# Altium PCB benchtoppcbv1.PcbDoc
Units mil, origin at the board's own origin, x right, y up, seen from the top; angles counter-clockwise.
Board outline 11400.67 x 6976.38 mil, 2 copper layers (LV, HV); 113 components, 23 nets, 183 pads, 0 vias.
Unrouted connection lines stored in the file: 29.
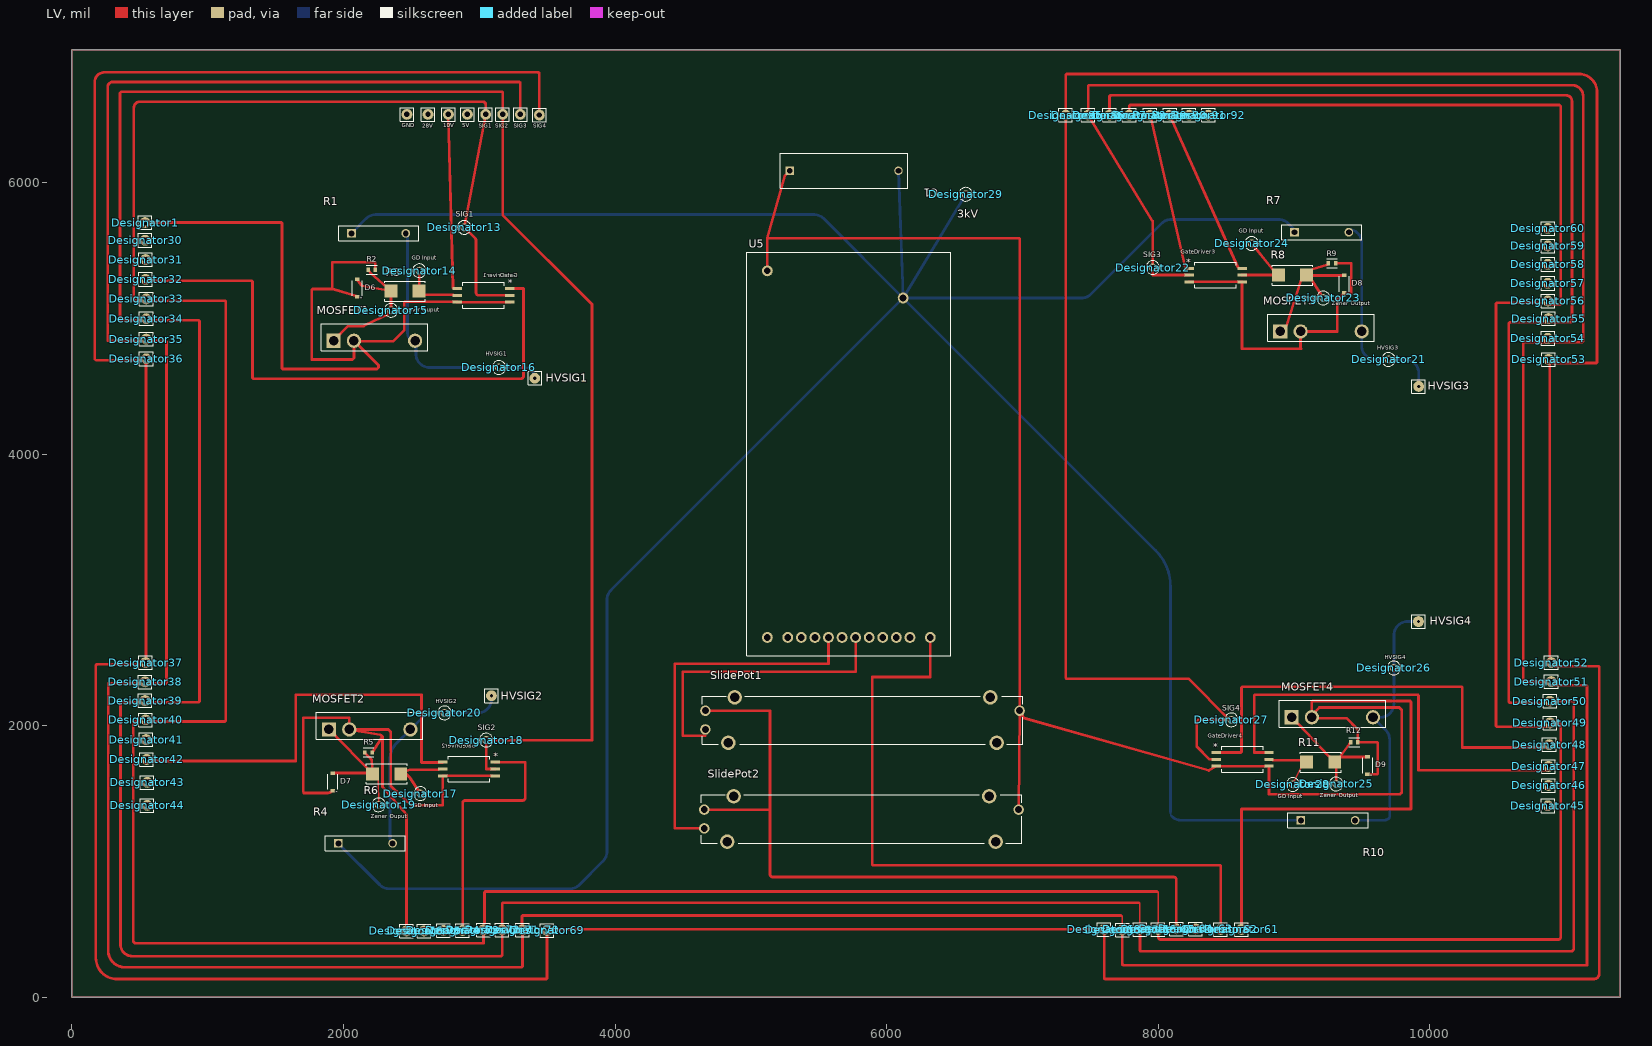
[diagram p0: LV view]
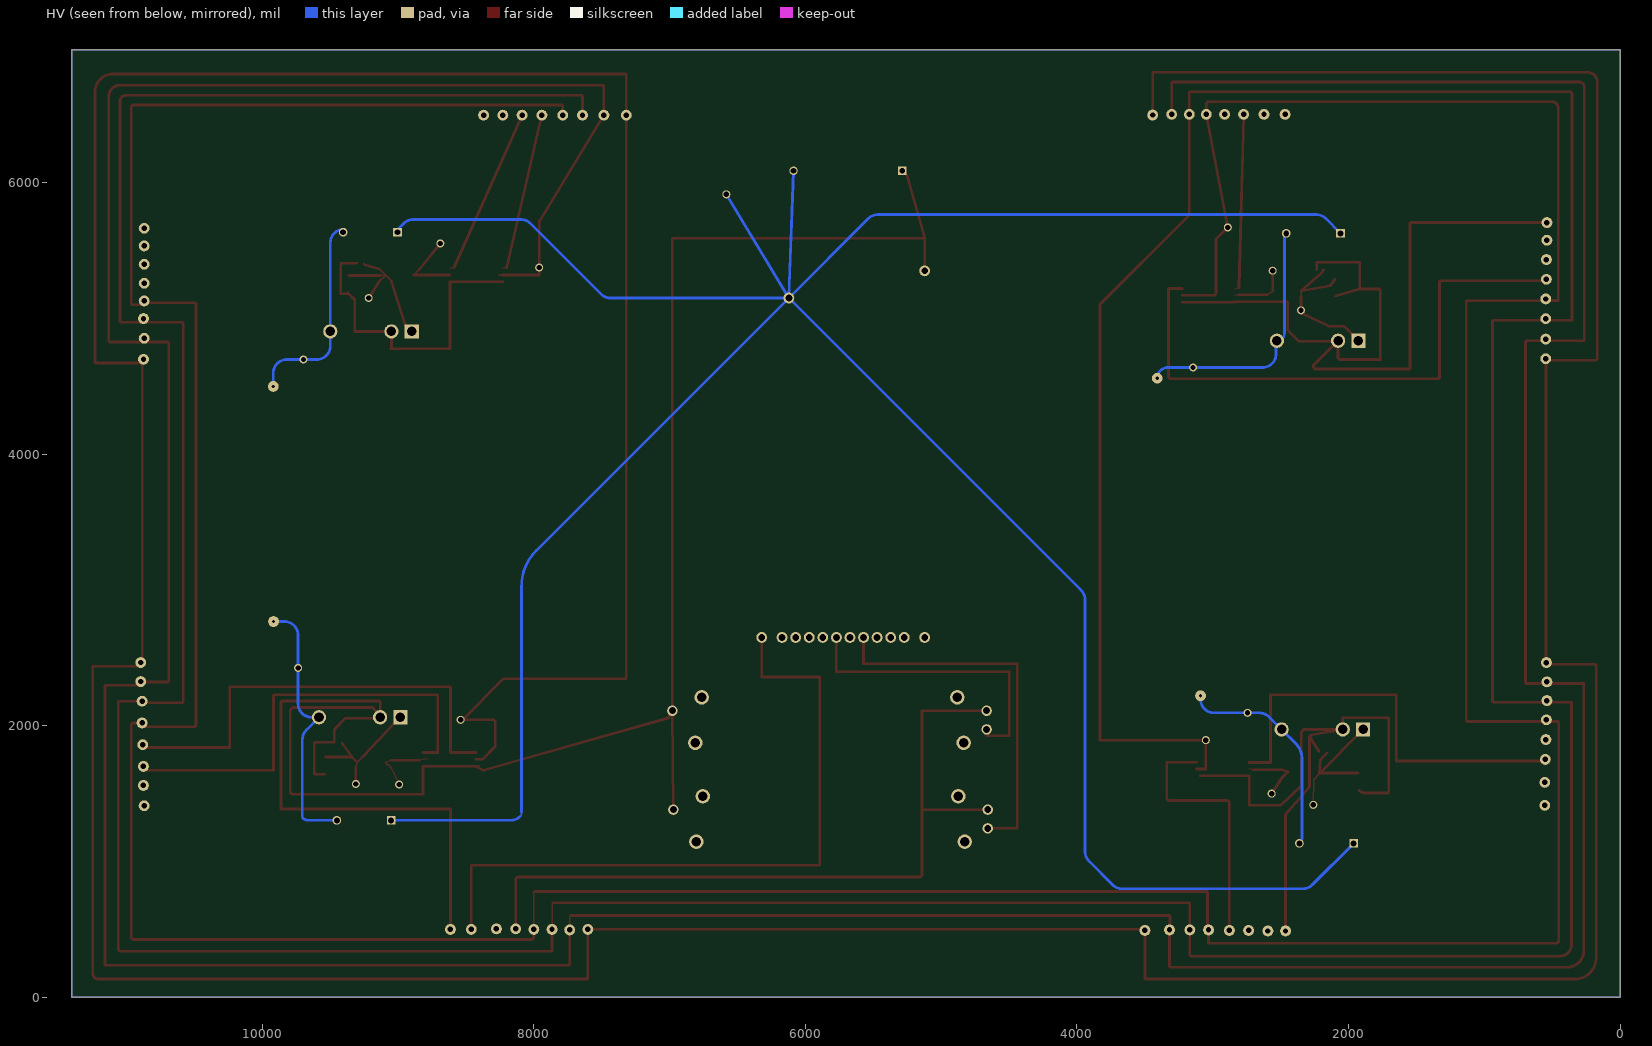
[diagram p1: HV view, seen from below]

## Layer stack, top to bottom
Top Solder: solder mask 0.4, Solder Resist, Dk 3.5
LV: signal copper 1.4
Dielectric 1: dielectric 12.6, FR-4, Dk 4.8
HV: signal copper 1.4
Bottom Solder: solder mask 0.4, Solder Resist, Dk 3.5

## Board outline
0,0 11400.67,0 11400.67,6976.38 0,6976.38

## Design rules (kind name [scope] priority, off if disabled: settings)
Clearance Clearance_1 [All] p1: gap=10 ignorepadtopadclearanceinfootprint=FALSE except(0: Arc-Hole Track-Hole SMDPad-Hole THPad-Hole Via-Hole Fill-Hole Poly-Hole Region-Hole Text-Hole)
Clearance [All] p2: gap=10 ignorepadtopadclearanceinfootprint=FALSE except(0: Arc-Hole Track-Hole SMDPad-Hole THPad-Hole Via-Hole Fill-Hole Poly-Hole Region-Hole Text-Hole)
Height [All] p1 off: minheight=0 maxheight=1000 prefheight=500
PolygonConnect [All] p1: connectstyle=Relief reliefconductorwidth=10 reliefentries=4 polygonreliefangle="90 Angle" airgapwidth=10
RoutingVias [All] p1: holewidth=28 width=50 viastyle="Through Hole" minholewidth=28 minwidth=50 maxholewidth=28 maxwidth=50
SolderMaskExpansion [All] p1: expansion=4 istentingtop=FALSE
Width [All] p1 off: maxlimit=10 minlimit=10 preferedwidth=10
29 further rules are at their usual default settings.

## Components (designator, comment, footprint, x,y, rotation, side; value= is the part's Value field where it differs from the comment)
5V "Comment" VIA 2912.09,6502.05 r0 top
10V "Comment" VIA 2772.09,6502.05 r0 top
28V "Comment" VIA 2622.09,6502.05 r0 top
C1 "27n" "HV CAPACITOR" 5286.5,6086.61 r0 top
D6 "Zener Diode" "ZENER DIODE" 2101.32,5222.24 r90 top
D7 "Zener Diode" "ZENER DIODE" 1920.35,1586.61 r90 top (schematic designator D6)
D8 "Zener Diode" "ZENER DIODE" 9369.17,5251.97 r90 top (schematic designator D6)
D9 "Zener Diode" "ZENER DIODE" 9541.22,1707.17 r90 top (schematic designator D6)
Designator1 "Via" VIA 538.46,5704.72 r0 top
Designator13 "Comment" KSTN-5003 2888.86,5669.29 r0 top
Designator14 "Comment" KSTN-5003 2558.15,5350.39 r0 top
Designator15 "Comment" KSTN-5003 2349.49,5059.06 r0 top
Designator16 "Comment" KSTN-5003 3144.76,4637.8 r0 top
Designator17 "Comment" KSTN-5003 2566.02,1500 r0 top
Designator18 "Comment" KSTN-5003 3050.28,1893.7 r0 top
Designator19 "Comment" KSTN-5003 2258.94,1417.32 r0 top
Designator20 "Comment" KSTN-5003 2743.19,2094.49 r0 top
Designator21 "Comment" KSTN-5003 9695.94,4696.85 r0 top
Designator22 "Comment" KSTN-5003 7959.72,5374.02 r0 top
Designator23 "Comment" KSTN-5003 9215.63,5149.61 r0 top
Designator24 "Comment" KSTN-5003 8688.07,5551.18 r0 top
Designator25 "Comment" KSTN-5003 9310.12,1570.87 r0 top
Designator26 "Comment" KSTN-5003 9735.31,2425.2 r0 top
Designator27 "Comment" KSTN-5003 8538.46,2043.31 r0 top
Designator28 "Comment" KSTN-5003 8991.22,1566.93 r0 top
Designator29 "Comment" KSTN-5003 6581.77,5913.39 r0 top
Designator30 "Comment" VIA 538.46,5574.8 r0 top
Designator31 "Comment" VIA 542.4,5432.4 r0 top
Designator32 "Comment" VIA 542.4,5287.4 r0 top
Designator33 "Comment" VIA 547.4,5142.4 r0 top
Designator34 "Comment" VIA 547.4,4997.4 r0 top
Designator35 "Comment" VIA 547.4,4847.4 r0 top
Designator36 "Comment" VIA 547.4,4702.4 r0 top
Designator37 "Comment" VIA 542.4,2464.57 r0 top
Designator38 "Comment" VIA 538.46,2322.83 r0 top
Designator39 "Comment" VIA 538.46,2185.04 r0 top
Designator40 "Comment" VIA 542.4,2043.31 r0 top
Designator41 "Comment" VIA 546.34,1897.64 r0 top
Designator42 "Comment" VIA 550.28,1751.97 r0 top
Designator43 "Comment" VIA 554.21,1582.68 r0 top
Designator44 "Comment" VIA 554.21,1413.39 r0 top
Designator45 "Comment" VIA 10869.02,1410.32 r0 top
Designator46 "Comment" VIA 10874.02,1560.32 r0 top
Designator47 "Comment" VIA 10874.02,1700.32 r0 top
Designator48 "Comment" VIA 10879.02,1860.32 r0 top
Designator49 "Comment" VIA 10884.02,2020.32 r0 top
Designator50 "Comment" VIA 10884.02,2180.31 r0 top
Designator51 "Comment" VIA 10894.02,2325.31 r0 top
Designator52 "Comment" VIA 10894.02,2465.31 r0 top
Designator53 "Comment" VIA 10873.7,4697.95 r0 top
Designator54 "Comment" VIA 10868.7,4852.95 r0 top
Designator55 "Comment" VIA 10873.7,4997.95 r0 top
Designator56 "Comment" VIA 10868.7,5127.95 r0 top
Designator57 "Comment" VIA 10868.7,5257.95 r0 top
Designator58 "Comment" VIA 10868.7,5397.95 r0 top
Designator59 "Comment" VIA 10868.7,5532.95 r0 top
Designator60 "Comment" VIA 10868.7,5662.95 r0 top
Designator61 "Comment" VIA 8613.27,500 r0 top
Designator62 "Comment" VIA 8459.72,500 r0 top
Designator63 "Comment" VIA 8274.68,503.94 r0 top
Designator64 "Comment" VIA 8132.95,503.94 r0 top
Designator65 "Comment" VIA 7999.09,500 r0 top
Designator66 "Comment" VIA 7865.24,500 r0 top
Designator67 "Comment" VIA 7735.31,496.06 r0 top
Designator68 "Comment" VIA 7601.46,500 r0 top
Designator69 "Comment" VIA 3499.09,492.13 r0 top
Designator70 "Comment" VIA 3317.99,496.06 r0 top
Designator71 "Comment" VIA 3168.39,496.06 r0 top
Designator72 "Comment" VIA 3030.59,496.06 r0 top
Designator73 "Comment" VIA 2877.05,492.13 r0 top
Designator74 "Comment" VIA 2735.32,492.13 r0 top
Designator75 "Comment" VIA 2593.58,488.19 r0 top
Designator76 "Comment" VIA 2463.66,488.19 r0 top
Designator85 "Comment" VIA 7317.99,6496.06 r0 top
Designator86 "Comment" VIA 7483.35,6496.06 r0 top
Designator87 "Comment" VIA 7640.83,6496.06 r0 top
Designator88 "Comment" VIA 7786.5,6496.06 r0 top
Designator89 "Comment" VIA 7940.04,6496.06 r0 top
Designator90 "Comment" VIA 8085.71,6496.06 r0 top
Designator91 "Comment" VIA 8227.44,6496.06 r0 top
Designator92 "Comment" VIA 8369.17,6496.06 r0 top
GateDriver1 "Comment" "GATE DRIVER"#1 3030.59,5169.29 r180 top
GateDriver2 "Comment" "GATE DRIVER"#1 2924.29,1681.1 r180 top
GateDriver3 "Comment" "GATE DRIVER"#2 8422.8,5318.46 r0 top
GateDriver4 "Comment" "GATE DRIVER"#2 8621.22,1752.17 r0 top
GND "Comment" VIA 2467.09,6502.05 r0 top
HVSIG1 "Comment" Via 3408.54,4559.06 r0 top
HVSIG2 "Comment" Via 3089.65,2220.47 r0 top
HVSIG3 "Comment" Via 9917.8,4498.46 r0 top
HVSIG4 "Comment" Via 9916.22,2767.17 r0 top
MOSFET1 "Comment" MOSFET 1926.65,4834.65 r0 top
MOSFET2 "Comment" MOSFET 1892.4,1972.44 r0 top
MOSFET3 "Comment" MOSFET 8897.8,4903.46 r0 top
MOSFET4 "Comment" MOSFET 8981.22,2062.17 r0 top
R1 "Comment" "HV RESISTOR" 2058.33,5626.06 r0 top
R2 "Resistor" "LV RESISTOR" 2207.76,5358.27 r180 top
R3 "Comment" "Zener Resistor" 2451.85,5200.79 r0 top
R4 "Comment" "HV RESISTOR" 1961.3,1133.86 r0 top
R5 "Resistor" "LV RESISTOR" 2184.13,1803.15 r180 top (schematic designator R2)
R6 "Comment" "Zener Resistor" 2317.99,1645.67 r0 top
R7 "Comment" "HV RESISTOR" 9003.03,5633.86 r0 top
R8 "Comment" "Zener Resistor" 8987.8,5318.46 r0 top
R9 "Resistor" "LV RESISTOR" 9278.62,5405.51 r180 top (schematic designator R2)
R10 "Comment" "HV RESISTOR" 9050.28,1303.15 r0 top
R11 "Comment" "Zener Resistor" 9196.22,1732.17 r0 top
R12 "Resistor" "LV RESISTOR" 9442.53,1877.95 r180 top (schematic designator R2)
SIG1 "Comment" VIA 3047.09,6502.05 r0 top
SIG2 "Comment" VIA 3172.09,6502.05 r0 top
SIG3 "Comment" VIA 3302.09,6502.05 r0 top
SIG4 "Comment" VIA 3442.09,6497.05 r0 top
SlidePot1 "Comment" "Slide Potentiometer" 4664.45,2110.24 r0 top
SlidePot2 "Comment" "Slide Potentiometer" 4656.57,1381.89 r0 top
U5 "Step Up Converter" "STEP UP CONVERTER" 6264.84,2635.04 r90 top

## Footprints (in the part's own frame and the unit in brackets; to place one, negate y for a bottom-side part, rotate by r counter-clockwise, add the part's x,y. Pads: shape width x height; smd on the part's side, far side on the other; paste and mask are expansions set on the pad)
"GATE DRIVER"#1 [mil] "ADuM4120"
  rect 69.53x22.08 smd paste+0 mask+0: 1(-194.13,-50) 2(-194.13,0) 3(-194.13,50) 4(194.13,50) 5(194.13,0) 6(194.13,-50)
  silkscreen extent -153,-95 153,95, body extent 0,-10 10,0, height 10
"GATE DRIVER"#2 [mil] "ADuM4120"
  rect 69.53x22.08 smd paste+0 mask+0: 1(-194.13,50) 2(-194.13,0) 3(-194.13,-50) 4(194.13,-50) 5(194.13,0) 6(194.13,50)
  silkscreen extent -153,-95 153,95, body extent 0,0 10,10, height 10
"HV CAPACITOR" [mil] "SV17_AVX"
  rect 62x62 hole 42 mask+0: 1(0,0)
  round 62 hole 42 mask+0: 2(800,0)
  silkscreen extent -70,-130 870,130, body extent 0,0 10,10, height 10
"HV RESISTOR" [mil] "RES_SM10203_OHM"
  rect 64x64 hole 44 mask+0: 1(0,0)
  round 64 hole 44 mask+0: 2(400,0)
  silkscreen extent -95,-55 495,55, body extent 0,0 10,10, height 10
KSTN-5003 [mm] "Test Point, Through Hole, Dia 2.54mm"
  round 1.5 hole 1: 1(0,0)
  silkscreen extent -1.27,-1.27 1.27,1.27, body extent -1.27,-1.27 1.27,1.27, height 4.57
"LV RESISTOR" [mil] "Yageo_AC0603_IPC_C"
  rect 25.93x31.97 smd paste+0 mask+0: 1(-26.64,0) 2(26.64,0)
  silkscreen extent -40,-33 40,33, body extent -44,-22 44,22, height 10
MOSFET [mm]
  rect 2.67x2.67 hole 1.78: 1(0,0)
  round 2.67 hole 1.78: 2(3.81,0) 3(15.24,0)
  silkscreen extent -2.34,-1.85 17.58,3.17, body extent -2.34,-1.85 17.58,3.17, height 26.52
"Slide Potentiometer" [mm] "PS4510MA1BR500"
  round 1.95 hole 1.3: 1(0,0) 2(0,-3.5) 3(58.8,0)
  round 2.7 hole 1.8: 4(5.5,2.5) 5(4.3,-6) 6(54.5,-6) 7(53.3,2.5)
  silkscreen extent -0.6,-6.25 59.4,2.75, body extent -0.6,-6.8 59.4,3.3, height 15.1
"STEP UP CONVERTER" [mil] "HRL30"
  round 80 hole 50: 1(14.57,1143.7) 2(14.57,993.7) 3(14.57,893.7) 4(14.57,793.7) 5(14.57,693.7) 6(14.57,593.7) 7(14.57,493.7) 8(14.57,393.7) 9(14.57,293.7) 10(14.57,193.7) 11(14.57,93.7) 12(14.57,-56.3) 13(2514.57,143.7) 14(2714.57,1143.7)
  silkscreen extent -120,-206 2850,1294
VIA [mil]
  round 80 hole 40: VIA(0,0)
  silkscreen extent -50,-50 50,50
Via [mil]
  round 80 hole 23: VIA(0,0)
  silkscreen extent -50,-50 50,50
"ZENER DIODE" [mil] "DIO_KDZLVTF100_ROM"
  rect 26x35 smd paste+0 mask+0: 1(-64,0) 2(64,0)
  silkscreen extent -56,-36 56,36, body extent 0,0 10,10, height 10
"Zener Resistor" [mil] "BO_PWR3014"
  rect 95x95 smd paste+0 mask+0: 1(-103.5,0) 2(103.5,0)
  silkscreen extent -150,-74 150,74, body extent 0,0 10,10, height 10

## Part data
C1: library part Capacitor
D6 D7 D8 D9: "KDZVTR16B", Built_By=EMA_Matt, Copyright="Copyright (C) 2018 Accelerated Designs. All rights reserved", Manufacturer_Part_Number=KDZVTR16B, RefDes=RefDes, SourceLibrary=Rohm_2019-09-23, Type=DEV, Vendor="ROHM Semiconductor"
U5: "HRL30"

## Nets (pads, with @x,y where several pads share a name; then routed paths per layer and width w, separated by ;. In a path a pad name is that pad's centre, name@x,y a point inside that pad or via, vN(x,y) a via of type N, cw(c..) or ccw(c..) an arc to the next point about the centre after c; other vN are vias at no path point)
3kV: C1.2 Designator29.1 R1.1 R4.1 R7.1 R10.1 U5.13 | length 22198.7
  LV w10: R10.1@9023.28,1325.54 R10.1
  HV w10: 8089.65,1366.14 8089.65,1356.78 ccw(c8124.06,1356.78) 8099.72,1332.45 ; R10.1@9040.43,1293.31 R10.1
  HV w20: R4.1 2266.66,828.5 ccw(c2337.37,899.21) 2337.37,799.21 3666.33,799.21 ccw(c3666.33,899.21) 3737.05,828.5 3910.75,1002.21 ccw(c3840.04,1072.92) 3940.04,1072.92 3940.04,2927.08 cw(c4040.04,2927.08) 3969.33,2997.79 U5.13 ; R1.1 2166.75,5734.49 cw(c2237.46,5663.78) 2237.46,5763.78 5465.55,5763.78 cw(c5465.55,5663.78) 5536.26,5734.49 U5.13 ; C1.2 U5.13 ; Designator29.1 U5.13 ; 8089.65,1366.14 8089.65,3025.06 ccw(c7712.94,3025.06) 7979.31,3291.44 U5.13 ; 8099.73,1332.44 ccw(c8170.44,1403.15) 8170.44,1303.15 R10.1 ; R7.1 9003.03,5653.23 8957.2,5699.06 ccw(c8886.49,5628.35) 8886.49,5728.35 8095.63,5728.35 ccw(c8095.63,5628.35) 8024.92,5699.06 7504.76,5178.9 cw(c7434.05,5249.61) 7434.05,5149.61 U5.13
5V: 5V.VIA Designator32.VIA Designator41.VIA Designator48.VIA Designator57.VIA Designator64.VIA Designator73.VIA Designator89.VIA GateDriver1.1 GateDriver2.1 GateDriver3.1 GateDriver4.1 SlidePot1.1 SlidePot2.1 | length 16294.2
  LV w10: 1323.95,5275.59 1329.8,5269.73 ; 1329.8,4560.98 1335.66,4555.12 ; GateDriver3.1@8198.91,5374.5 GateDriver3.1 ; 10233.39,2287.4 10239.25,2281.54 ; 10239.26,1838.61 10245.11,1832.76
  LV w20: Designator32.VIA@542.4,5275.59 1323.95,5275.59 ; 1329.8,4560.98 1329.8,5269.73 ; 1335.66,4555.12 3305.87,4555.12 ccw(c3305.87,4575.12) 3325.87,4575.12 3325.87,5219.29 GateDriver1.1 ; Designator73.VIA 2877.05,1428.88 cw(c2897.05,1428.82) 2896.98,1448.82 3317.74,1448.82 ccw(c3317.68,1468.82) 3337.68,1468.82 3337.68,1731.1 GateDriver2.1 ; SlidePot2.1 5140.83,1381.89 ; SlidePot1.1 5140.83,2110.24 5140.83,1381.89 ; Designator89.VIA GateDriver3.1@8198.91,5374.5 ; Designator64.VIA 8132.95,865.83 ccw(c8112.95,865.83) 8112.95,885.83 5160.83,885.83 cw(c5160.83,905.83) 5140.83,905.83 5140.83,1381.89 ; GateDriver4.1 8607.41,1802.17 8613.27,1808.02 8613.27,2281.54 8619.13,2287.4 10233.39,2287.4 ; 10239.26,1838.61 10857.31,1838.61 Designator48.VIA Designator48.VIA@10894.86,1844.47 ; 10239.25,1838.61 10239.25,2281.54
10V: 10V.VIA Designator31.VIA Designator42.VIA Designator47.VIA Designator58.VIA Designator63.VIA Designator74.VIA Designator90.VIA GateDriver1.6 GateDriver2.6 GateDriver3.6 GateDriver4.6 | length 8986.1
  LV w10: GateDriver2.6@2730.17,1728.35 GateDriver2.6 ; GateDriver1.6@2806.7,5225.33 GateDriver1.6 ; GateDriver3.6@8587.16,5374.5 GateDriver3.6
  LV w20: Designator42.VIA@550.28,1740.16 1648.7,1740.16 1648.7,2228.35 2573.9,2228.35 2573.9,1728.35 GateDriver2.6@2730.17,1728.35 ; 10V.VIA GateDriver1.6@2806.7,5225.33 ; Designator90.VIA GateDriver3.6@8587.16,5374.5 ; GateDriver4.6 8707.76,1802.17 8707.76,2222.49 8713.61,2228.35 9910.56,2228.35 9916.42,2222.49 9916.42,1672.76 Designator47.VIA@10874.02,1672.76
28V: 28V.VIA Designator30.VIA Designator43.VIA Designator46.VIA Designator59.VIA Designator62.VIA Designator75.VIA Designator91.VIA U5.12 | length 5138
  LV w10: 5892.8,978.3 5898.65,972.44 ; 8453.87,972.44 8459.72,966.58
  LV w20: 5892.8,978.3 5892.8,2358.27 6321.14,2358.27 U5.12 ; 5898.65,972.44 8453.87,972.44 ; Designator62.VIA 8459.72,966.58
GND: C1.1 D6.1 D7.1 D8.1 D9.1 Designator1.VIA Designator44.VIA Designator45.VIA Designator60.VIA Designator61.VIA Designator76.VIA Designator92.VIA GateDriver1.3 GateDriver1.4 GateDriver2.3 GateDriver2.4 GateDriver3.3 GateDriver3.4 GateDriver4.3 GateDriver4.4 GND.VIA MOSFET1.2 MOSFET2.2 MOSFET3.2 MOSFET4.2 R2.1 R5.1 R9.1 R12.1 SlidePot1.3 SlidePot2.3 U5.14 | length 29522.7
  LV w10: 1540.48,5705.59 1546.34,5699.73 ; 1703.82,1513.44 ccw(c1717.26,1513.44) 1707.76,1503.94 ; 1916.42,5222.48 1920.93,5216.26 ; D6.1@2088.82,5166.24 D6.1 ; R5.1 R5.1@2218.74,1814.14 ; GateDriver2.4 GateDriver2.4@2731.38,1631.1 ; 6973.55,5590.55 6979.41,5584.69 ; GateDriver4.3@8397.33,1708.2 GateDriver4.3 ; 9047.8,4778.07 9050.28,4775.59 ; D8.1@9369.17,5181.1 D8.1
  LV w20: Designator1.VIA@538.46,5705.59 1540.48,5705.59 ; 1546.34,5699.73 1546.34,4631.84 1552.2,4625.98 2245.31,4625.98 2257.03,4637.7 2257.03,4654.27 MOSFET1.2 2076.65,4708.57 2064.94,4696.85 1766.81,4696.85 1766.81,5210.4 1772.67,5216.26 1916.42,5216.26 ; 1703.82,1513.44 1703.82,2059.06 2042.4,2059.06 MOSFET2.2 ; 1707.76,1503.94 1875.26,1503.94 ccw(c1875.26,1567.7) D7.1 ; 1916.42,5222.48 1916.42,5413.39 2234.4,5413.39 R2.1 ; 1920.93,5216.26 D6.1@2088.82,5166.24 ; MOSFET1.2@2083.13,4830.79 2365.32,4830.79 2447.91,4913.39 2447.91,5116.39 2453.77,5122.24 GateDriver1.4@2836.46,5122.24 ; R5.1@2218.74,1814.14 2286.5,1918.88 ; Designator76.VIA 2463.66,1346.68 2291.41,1544.74 2286.5,1550.39 2286.5,1557.87 2286.5,1918.88 ; GateDriver1.4 GateDriver1.3 ; GateDriver2.3@3090.86,1631.1 2731.38,1631.1 2731.38,1413.39 2499.09,1413.39 2347.8,1556.37 2347.8,1954.54 2329.9,1972.44 MOSFET2.2 ; U5.14 5121.14,5590.55 ; C1.1 5248.35,6048.47 5121.14,5590.55 ; SlidePot2.3 SlidePot1.3 ; 6973.55,5590.55 5121.14,5590.55 ; 6979.41,5584.69 SlidePot1.3 ; GateDriver3.3 GateDriver3.4 8616.92,4775.59 9050.28,4775.59 ; Designator61.VIA 8613.27,1385.83 9861.3,1385.83 9861.3,2175.24 9855.44,2181.1 9137.08,2181.1 9131.22,2175.24 MOSFET4.2@9131.22,2082.2 ; 9047.8,4778.07 MOSFET3.2 9317.8,4903.46 9317.8,5136.59 D8.1 ; R9.1 9420.35,5405.51 9420.35,5181.1 D8.1@9369.17,5181.1 ; D9.1 9611.35,1643.17 9617.2,1649.02 9617.2,1872.09 9611.35,1877.95 R12.1 9469.18,1970.86 9384.92,2055.12 9138.27,2055.12 MOSFET4.2 9131.22,2080.07 9185.87,2134.72 9774.42,2134.72 9792.76,2116.39 9792.76,1507.78 9781.04,1496.06 8815.35,1496.06 GateDriver4.4 GateDriver4.3 8370.77,1670.72 7009.26,2056.76 SlidePot1.3 ; MOSFET2.2 2269.88,1933.45 2274.78,1930.6 2286.5,1918.88
HVSIG1: Designator16.1 HVSIG1.VIA MOSFET1.3 R1.2 | length 1897.9
  HV w20: R1.2 2465.68,5618.71 cw(c2451.54,5604.57) 2471.54,5604.57 2471.54,4889.76 ccw(c2526.65,4889.76) MOSFET1.3 ; MOSFET1.3@2533.13,4830.79 2533.13,4737.8 ccw(c2633.13,4737.8) 2633.13,4637.8 Designator16.1 3329.8,4637.8 cw(c3329.8,4559.06) HVSIG1.VIA
HVSIG2: Designator20.1 HVSIG2.VIA MOSFET2.3 R4.2 | length 1628.6
  LV w10: HVSIG2.VIA@3089.65,2194.49 HVSIG2.VIA
  HV w10: R4.2 R4.2@2361.3,1147.03
  HV w20: R4.2@2361.3,1147.03 2341.61,1166.72 2341.61,1752.39 cw(c2508.82,1752.39) 2390.59,1870.63 MOSFET2.3 2585.16,2065.2 cw(c2655.87,1994.49) 2655.87,2094.49 Designator20.1 2989.65,2094.49 ccw(c2989.65,2194.49) HVSIG2.VIA@3089.65,2194.49
HVSIG3: Designator21.1 HVSIG3.VIA MOSFET3.3 R7.2 | length 1543.4
  HV w20: R7.2@9402.8,5653.46 cw(c9402.8,5558.46) 9497.8,5558.46 9497.8,5327.14 MOSFET3.3 9497.8,4796.85 ccw(c9597.8,4796.85) 9597.8,4696.85 Designator21.1 9817.8,4696.85 cw(c9817.8,4596.85) 9917.8,4596.85 HVSIG3.VIA
HVSIG4: Designator26.1 HVSIG4.VIA MOSFET4.3 R10.2 | length 2087.2
  LV w10: MOSFET4.3@9550.28,2062.17 MOSFET4.3
  HV w10: R10.2 ccw(c9459.78,1312.65) R10.2@9459.78,1299.21 ; MOSFET4.3@9550.28,2062.17 9561.39,2051.05 MOSFET4.3@9561.39,2019.86 ; MOSFET4.3 9635.31,2062.17 ; 9699.88,1318.9 ccw(c9690.38,1328.4) 9703.82,1328.4
  HV w20: R10.2 9661.86,1303.15 ccw(c9661.86,1356.92) 9699.88,1318.9 ; MOSFET4.3 9674.53,1968.86 cw(c9603.82,1898.15) 9703.82,1898.15 9703.82,1328.4 ; 9635.31,2062.17 ccw(c9635.31,2162.17) 9735.31,2162.17 Designator26.1 9735.31,2667.17 cw(c9835.31,2667.17) 9835.31,2767.17 HVSIG4.VIA
IPGM: SlidePot1.2 U5.7 | length 2161.8
  LV w20: 4664.45,1925.2 4499.09,1925.2 4499.09,2397.64 5771.14,2397.64 U5.7
NetD1: D6.2 Designator15.1 MOSFET1.1 R2.2 R3.1 | length 1151.1
  LV w10: R3.1 R3.1@2349.49,5158.29
  LV w20: MOSFET1.1 2033.9,4941.89 2140.89,4941.89 2149.69,4943.93 2342.4,5038.36 Designator15.1 R3.1@2349.49,5158.29 ; D6.2 2109.11,5274.99 2133.37,5239.92 2342.66,5201.82 R3.1 2198.6,5334.15 R2.2
NetD2: D7.2 Designator19.1 MOSFET2.1 R5.2 R6.1 | length 1221
  LV w10: MOSFET2.1 MOSFET2.1@1939.96,1924.88 ; D7.2 D7.2@1932.85,1651.04 ; R6.1 2256.99,1603.17 Designator19.1
  LV w20: MOSFET2.1@1894.2,1972.42 1940.39,1925.3 2172.42,1688.59 2202.56,1657.84 R6.1 2208.51,1740.93 2208.03,1748.47 2202.69,1753.81 2160.46,1796.04 2160.46,1797.16 2158.49,1799.14 R5.2@2157.67,1799.14 ; D7.2@1932.85,1651.04 R6.1@2195.61,1651.04
NetD3: D8.2 Designator23.1 MOSFET3.1 R8.2 R9.2 | length 1145.9
  LV w10: MOSFET3.1 MOSFET3.1@8945.35,4951.02 ; R8.2@9048.8,5275.96 R8.2 ; R8.2@9133.8,5275.96 R8.2 ; R8.2@9133.8,5316.08 R8.2 ; R8.2@9133.8,5360.96 R8.2 ; R9.2@9244.01,5394.52 R9.2 ; D8.2@9356.67,5316.08 D8.2
  LV w20: MOSFET3.1@8945.35,4951.02 R8.2@9048.8,5275.96 ; R8.2@9133.8,5275.96 Designator23.1 ; R8.2@9133.8,5316.08 D8.2@9356.67,5316.08 ; R8.2@9133.8,5360.96 R9.2@9244.01,5394.52
NetD4: D9.2 Designator25.1 MOSFET4.1 R11.2 R12.2 | length 1063.7
  LV w10: MOSFET4.1 MOSFET4.1@9028.78,2014.61 ; R11.2@9257.22,1774.67 R11.2 ; R11.2@9310.12,1689.67 R11.2 ; R11.2@9342.22,1769.15 R11.2 ; R11.2@9342.22,1774.67 R11.2 ; R12.2@9407.92,1866.97 R12.2 ; D9.2@9528.72,1769.15 D9.2
  LV w20: MOSFET4.1@9028.78,2014.61 R11.2@9257.22,1774.67 ; Designator25.1 R11.2@9310.12,1689.67 ; R11.2@9342.22,1769.15 D9.2@9528.72,1769.15 ; R11.2@9342.22,1774.67 R12.2@9407.92,1866.97
NetR1: Designator14.1 GateDriver1.5 R3.2 | length 440.5
  LV w10: R3.2@2558.15,5203.59 R3.2 R3.2@2597.85,5172.63 ; GateDriver1.5@2806.7,5172.63 GateDriver1.5
  LV w20: R3.2@2558.15,5203.59 Designator14.1 ; R3.2@2597.85,5172.63 GateDriver1.5@2806.7,5172.63
NetR2: Designator17.1 GateDriver2.5 R6.2 | length 490.3
  LV w10: GateDriver2.5@2700.4,1675.06 GateDriver2.5
  LV w20: Designator17.1 2487.61,1618.92 2445.11,1661.42 2487.61,1675.06 GateDriver2.5@2700.4,1675.06
NetR3: Designator24.1 GateDriver3.5 R8.1 | length 572
  LV w10: R8.1@8841.8,5360.96 R8.1
  LV w20: GateDriver3.5 R8.1 ; Designator24.1 R8.1@8841.8,5360.96
NetR4: Designator28.1 GateDriver4.5 R11.1 | length 506.9
  LV w10: GateDriver4.5@8785.58,1758.2 GateDriver4.5 GateDriver4.5@8845.11,1746.13 ; Designator28.1 9050.22,1689.67 R11.1 R11.1@9050.22,1746.13
  LV w20: GateDriver4.5@8845.11,1746.13 R11.1@9050.22,1746.13
SIG1: Designator13.1 Designator33.VIA Designator40.VIA Designator49.VIA Designator56.VIA Designator65.VIA Designator72.VIA Designator88.VIA GateDriver1.2 SIG1.VIA | length 33430.1
  LV w10: 455.79,6551.14 ccw(c445.79,6551.14) 455.79,6551.24 ; Designator33.VIA@536.66,5131.66 Designator33.VIA Designator33.VIA@559.88,5129.92 ; Designator72.VIA Designator72.VIA@3038.46,496.06 ; 7989.09,779.53 cw(c7989.09,769.53) 7999.09,769.53 Designator65.VIA ; 10487.28,1998.61 10493.14,1992.76 ; Designator49.VIA@10856.46,1992.76 Designator49.VIA ; Designator56.VIA@10868.7,5114.17 10868.7,5110.39 ccw(c10878.7,5110.39) Designator56.VIA@10878.7,5100.39 ; 10953.66,6570.87 cw(c10953.66,6560.87) 10963.66,6560.91
  LV w20: 455.79,6551.14 455.79,5131.66 Designator33.VIA@536.66,5131.66 ; 455.79,6551.25 cw(c499.29,6550.99) 499.09,6594.49 3027.09,6594.49 cw(c3027.09,6574.49) 3047.09,6574.49 SIG1.VIA Designator13.1 2970.52,5587.63 cw(c2956.38,5573.49) 2976.38,5573.49 2976.38,5189.23 ccw(c2996.38,5189.29) 2996.31,5169.29 GateDriver1.2 ; Designator33.VIA@559.88,5129.92 1122.95,5129.92 cw(c1122.95,5119.92) 1132.95,5119.97 1132.95,2041.5 cw(c1122.95,2041.5) 1122.95,2031.5 461.85,2031.5 ccw(c461.85,2021.5) 451.85,2021.5 451.85,417.64 ccw(c471.85,417.64) 471.85,397.64 3030.59,397.64 Designator72.VIA ; Designator72.VIA@3038.46,496.06 3038.46,769.57 cw(c3048.46,769.53) 3048.42,779.53 7989.09,779.53 ; Designator88.VIA 7786.5,6565.01 7792.35,6570.87 10953.66,6570.87 ; Designator65.VIA 7999.09,445.2 ccw(c8019.09,445.2) 8019.09,425.2 10944.57,425.2 ccw(c10944.57,445.2) 10964.57,445.2 10964.57,2000.38 ccw(c10944.57,2000.32) 10944.57,2020.32 Designator49.VIA ; 10487.28,1998.61 10487.28,5108.32 10493.14,5114.17 Designator56.VIA@10868.7,5114.17 ; 10493.14,1992.76 Designator49.VIA@10856.46,1992.76 ; Designator56.VIA@10878.7,5100.39 10953.66,5100.39 ccw(c10953.66,5110.39) 10963.66,5110.39 10963.66,6560.91
SIG2: Designator18.1 Designator34.VIA Designator39.VIA Designator50.VIA Designator55.VIA Designator66.VIA Designator71.VIA Designator87.VIA GateDriver2.2 SIG2.VIA | length 38610.5
  LV w10: 353.43,6659.34 cw(c363.43,6659.29) 363.38,6669.29 ; 934.18,4985.59 940.04,4979.73 ; 7855.24,696.85 cw(c7855.24,686.85) 7865.24,686.85 Designator66.VIA
  LV w20: 353.43,6659.34 353.43,4985.59 934.18,4985.59 ; 363.38,6669.29 3162.09,6669.29 cw(c3162.09,6659.29) 3172.09,6659.29 SIG2.VIA 3172.09,5761.12 3829.8,5103.4 3829.8,1893.7 Designator18.1 3050.28,1681.1 GateDriver2.2 ; 940.04,4979.73 940.04,2179.09 934.18,2173.23 357.36,2173.23 357.36,387.91 ccw(c442.5,388.29) 442.12,303.15 3158.43,303.15 ccw(c3158.39,313.15) 3168.39,313.15 Designator71.VIA 3168.39,686.9 cw(c3178.39,686.85) 3178.34,696.85 7855.24,696.85 ; Designator87.VIA 7640.83,6631.78 cw(c7650.83,6631.73) 7650.78,6641.73 11004.7,6641.73 cw(c11004.7,6600.09) 11046.34,6600.28 11046.34,4980.39 cw(c11036.34,4980.39) 11036.34,4970.39 10591.77,4970.39 ccw(c10591.77,4960.39) 10581.77,4960.39 10581.77,2179.25 ccw(c10591.77,2179.29) 10591.73,2169.29 Designator50.VIA@10884.02,2169.29 ; Designator66.VIA 7865.24,348.58 ccw(c7875.24,348.58) 7875.24,338.58 11039.06,338.58 ccw(c11039.06,358.58) 11059.06,358.58 11059.06,2150.1 11059.06,2180.31 Designator50.VIA
SIG3: Designator22.1 Designator35.VIA Designator38.VIA Designator51.VIA Designator54.VIA Designator67.VIA Designator70.VIA Designator86.VIA GateDriver3.2 SIG3.VIA | length 35025.4
  LV w10: 262.87,6702.58 ccw(c252.87,6702.58) 262.87,6702.66 ; 690.09,2311.02 695.94,2316.88 ; 690.09,4835.59 695.94,4829.73 ; Designator70.VIA@3314.06,496.06 Designator70.VIA ; 7725.31,602.36 cw(c7725.31,592.36) 7735.31,592.36 Designator67.VIA ; GateDriver3.2 8252.39,5318.46 GateDriver3.2@8258.43,5324.5 ; Designator51.VIA@10890.95,2322.25 Designator51.VIA Designator51.VIA@10894.02,2297.76
  LV w20: 262.87,6702.58 262.87,4835.59 690.09,4835.59 ; 262.87,6702.68 cw(c300.56,6702.47) 300.39,6740.16 3292.09,6740.16 cw(c3292.09,6730.16) 3302.09,6730.16 SIG3.VIA ; 690.09,2311.02 266.81,2311.02 266.81,344.6 ccw(c391.5,345.16) 390.94,220.47 3308.04,220.47 ccw(c3307.99,230.47) 3317.99,230.47 Designator70.VIA ; 695.94,2316.88 695.94,4829.73 ; Designator70.VIA@3314.06,496.06 3314.06,592.41 cw(c3324.06,592.36) 3324.01,602.36 7725.31,602.36 ; Designator67.VIA 7735.31,246.22 ccw(c7745.31,246.22) 7745.31,236.22 11157.48,236.22 11157.48,2287.8 ccw(c11147.48,2287.76) 11147.48,2297.76 Designator51.VIA@10894.02,2297.76 ; GateDriver3.2 7959.72,5318.46 Designator22.1 7959.72,5714.61 7953.87,5720.47 Designator86.VIA 7483.35,6706.58 cw(c7493.35,6706.54) 7493.3,6716.54 11047.83,6716.54 cw(c11047.83,6635.35) 11129.02,6635.71 11129.02,4835.39 cw(c11119.02,4835.39) 11119.02,4825.39 10698.07,4825.39 ccw(c10698.07,4815.39) 10688.07,4815.39 10688.07,2332.21 ccw(c10698.07,2332.25) 10698.03,2322.25 Designator51.VIA@10890.95,2322.25
SIG4: Designator27.1 Designator36.VIA Designator37.VIA Designator52.VIA Designator53.VIA Designator68.VIA Designator69.VIA Designator85.VIA GateDriver4.2 SIG4.VIA | length 40325.2
  LV w10: 168.39,4700.55 ccw(c178.39,4700.59) 178.34,4690.59 ; 168.39,6741.95 ccw(c158.39,6741.95) 168.39,6742.04 ; Designator37.VIA Designator37.VIA@544.9,2467.07 ; Designator36.VIA@544.9,4690.59 544.9,4699.9 Designator36.VIA ; Designator69.VIA Designator69.VIA@3499.09,500 ; 7317.99,2352.31 7323.85,2346.46 ; Designator27.1@8525.19,2043.31 Designator27.1 ; Designator53.VIA 10883.86,4687.8 Designator53.VIA@10901.26,4670.39 ; Designator52.VIA@10883.86,2475.47 Designator52.VIA
  LV w20: 168.39,4700.55 168.39,6741.95 ; 168.39,6742.05 cw(c237.71,6741.7) 237.4,6811.02 3432.09,6811.02 cw(c3432.09,6801.02) 3442.09,6801.02 SIG4.VIA ; 178.34,4690.59 544.9,4690.59 Designator37.VIA@544.9,2467.07 ; 331.84,133.86 cw(c332.58,290.18) 176.26,289.48 176.26,2442.76 cw(c186.26,2442.76) 186.26,2452.76 Designator37.VIA@542.4,2452.76 ; 331.9,133.86 3489.14,133.86 ccw(c3489.09,143.86) 3499.09,143.86 Designator69.VIA ; Designator69.VIA@3499.09,500 Designator68.VIA 7601.46,143.86 ccw(c7611.46,143.86) 7611.46,133.86 11205.67,133.86 ccw(c11205.48,176.4) 11248.03,176.4 11248.03,2427.8 ccw(c11238.03,2427.76) 11238.03,2437.76 10921.57,2437.76 Designator52.VIA ; 7317.99,2352.31 Designator85.VIA 7317.99,6789.26 cw(c7327.99,6789.21) 7327.95,6799.21 11098.78,6799.21 cw(c11098.78,6666.62) 11231.38,6667.21 11231.38,4680.39 cw(c11221.38,4680.39) 11221.38,4670.39 Designator53.VIA@10901.26,4670.39 ; 7323.85,2346.46 8222.04,2346.46 8525.19,2043.31 8294.98,2043.31 8283.27,2031.59 8283.27,1845.75 8376.85,1752.17 GateDriver4.2 ; Designator52.VIA@10883.86,2475.47 Designator53.VIA@10883.86,4687.8
VPGM: SlidePot2.2 U5.5 | length 2753.1
  LV w20: SlidePot2.2 4440.04,1244.09 4440.04,2456.69 5571.14,2456.69 U5.5
pads on no net: SlidePot1.4 SlidePot1.5 SlidePot1.6 SlidePot1.7 SlidePot2.4 SlidePot2.5 SlidePot2.6 SlidePot2.7 U5.1 U5.2 U5.3 U5.4 U5.6 U5.8 U5.9 U5.10 U5.11

## Other copper
Multi-Layer:
  lines w10: 0,0 11401.57,0 11401.57,6976.38 0,6976.38 0,0

## Silkscreen, mask and mechanical layers (free items; w line width, h text height)
Top Overlay:
  text "SIG1" at 2827.99,5746.22 h40
  text "3kV" at 6520.91,5742.28 h60
  text "GD Input" at 8591.77,5630.23 h30
  text "SIG3" at 7890.98,5450.94 h40
  text "GD Input" at 2501.22,5429.45 h30
  text "Zener Output" at 9276.81,5094.8 h30
  text "Zener Ouput" at 2438.23,5047.56 h30
  text "HVSIG3" at 9611.46,4769.84 h30
  text "HVSIG1" at 3048.46,4722.6 h30
  text "HVSIG4" at 9666.57,2490.31 h30
  text "HVSIG2" at 2678.39,2163.54 h30
  text "SIG4" at 8469.72,2108.43 h40
  text "SIG2" at 2989.41,1966.69 h40
  text "Zener Output" at 9190.2,1472.75 h30
  text "GD Input" at 8879.17,1464.88 h30
  text "GD Input" at 2513.03,1397.95 h30
  text "Zener Ouput" at 2202.01,1319.21 h30

## Text inside footprints (layer, text, board x,y; h text height)
D6: Top Overlay "*" at 2140.32,5143.24 h20 r90; Mechanical 13 "*" at 2126.32,5168.74 h50 r90
D7: Top Overlay "*" at 1959.35,1507.61 h20 r90; Mechanical 13 "*" at 1945.35,1533.11 h50 r90
D8: Top Overlay "*" at 9408.17,5172.97 h20 r90; Mechanical 13 "*" at 9394.17,5198.47 h50 r90
D9: Top Overlay "*" at 9580.22,1628.17 h20 r90; Mechanical 13 "*" at 9566.22,1653.67 h50 r90
GateDriver1: Top Overlay "*" at 3247.22,5236.37 h50; Mechanical 13 "*" at 3175.73,5206.35 h50
GateDriver2: Top Overlay "*" at 3140.92,1748.18 h50; Mechanical 13 "*" at 3069.43,1718.16 h50
GateDriver3: Top Overlay "*" at 8206.17,5385.54 h50; Mechanical 13 "*" at 8277.66,5355.52 h50
GateDriver4: Top Overlay "*" at 8404.59,1819.24 h50; Mechanical 13 "*" at 8476.08,1789.22 h50